# Altium PCB Slave.PcbDoc
Units mm, origin at the board's own origin, x right, y up, seen from the top; angles counter-clockwise.
Board outline 400 x 89 mm, 2 copper layers (Top Copper, Bottom Copper), stack 1.57 mm thick; 25 components, 17 nets, 98 pads, 15 vias.
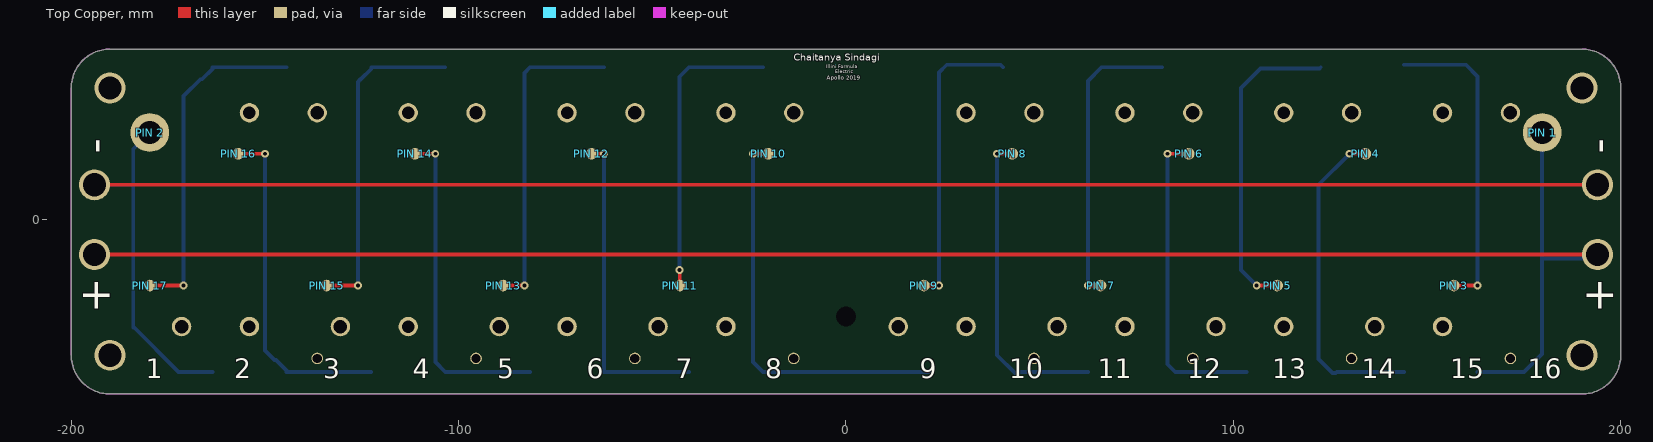
[diagram p0: Top Copper view]
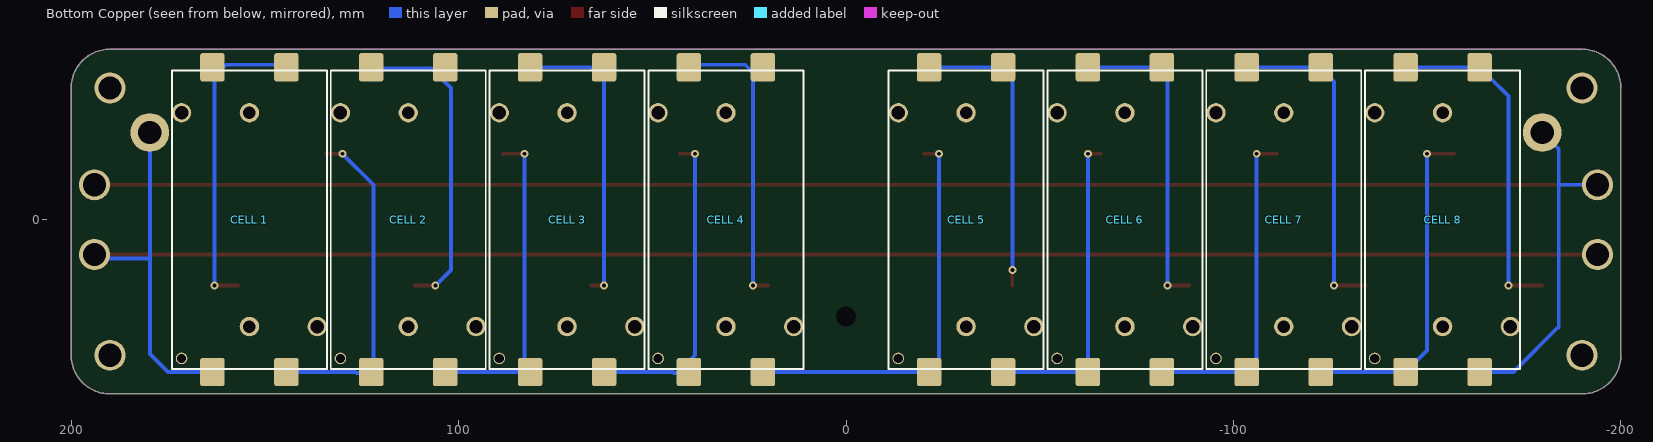
[diagram p1: Bottom Copper view, seen from below]

## Layer stack, top to bottom
Top Mask: solder mask 0.01, Solder Resist, Dk 3.8
Top Copper: signal copper 0.035
Core: core 1.5, FR-4, Dk 4.5
Bottom Copper: signal copper 0.035
Bottom Mask: solder mask 0.1, Solder Resist, Dk 3.8

## Board outline
-200,-35 -200,34 cw(c-190,34) -190,44 190,44 cw(c190,34) 200,34 200,-35 cw(c190,-35) 190,-45 -190,-45 cw(c-190,-35)

## Design rules (kind name [scope] priority, off if disabled: settings)
Clearance "Board Outline" [OnLayer('Keep-Out Layer')] p1: gap=0.2 ignorepadtopadclearanceinfootprint=TRUE
Clearance [All] p2: gap=0.102 ignorepadtopadclearanceinfootprint=TRUE
ComponentClearance [All] p1: gap=0 collisioncheckmode=3 verticalgap=0 showdistances=FALSE
FanoutControl Fanout_SOIC [IsSOIC] p3: bgadir=Out bgaviamode=Centered fanoutstyle=Auto fanoutdirection=InThenOut viagrid=0.025 // Fanout_SOIC (Default Rule)
HoleSize [All] p1: absolutevalues=TRUE maxlimit=6.3 minlimit=0.2 maxpercent=80.000 minpercent=20.000
HoleToHoleClearance [All] p1: gap=0.15 allowstackedmicrovias=TRUE
MinimumAnnularRing [All] p1: minimumring=0.076
MinimumSolderMaskSliver [All] p1: minsoldermaskwidth=0.051
PolygonConnect "Power components" [HasFootprint('FUSE1206') OR (HasFootprint('TO252') OR HasFootprint('NTC-0603'))] p1: connectstyle=Direct reliefconductorwidth=0.254 reliefentries=4 polygonreliefangle="90 Angle" airgapwidth=0.254
PolygonConnect [All] p2: thpad.connectstyle=Relief thpad.reliefconductorwidth=0.254 thpad.reliefentries=4 thpad.polygonreliefangle="90 Angle" thpad.airgapwidth=0.254 smdpad.connectstyle=Relief smdpad.reliefconductorwidth=0.254 smdpad.reliefentries=4 smdpad.polygonreliefangle="90 Angle" smdpad.airgapwidth=0.254 via.connectstyle=Direct via.reliefconductorwidth=0.254 via.reliefentries=4 via.polygonreliefangle="90 Angle" via.airgapwidth=0.254
RoutingVias [All] p1: holewidth=0.2 width=0.45 viastyle="Through Hole" minholewidth=0.2 minwidth=0.45 maxholewidth=1 maxwidth=2
SilkToSilkClearance [All] p1: silktosilkclearance=0
SilkToSolderMaskClearance [IsPad] p1: minsilkscreentomaskgap=0 clearancetoexposedcopper=TRUE
SolderMaskExpansion [All] p1: expansion=0.102
ViasUnderSMD [All] p1: allowed=TRUE
Width [All] p1: maxlimit=12.7 minlimit=0.102 preferedwidth=0.254
23 further rules are at their usual default settings.

## Classes and differential pairs
component class Carrier: "CELL 1" "CELL 2" "CELL 3" "CELL 4" "CELL 5" "CELL 6" "CELL 7" "CELL 8" "PIN 2" "PIN 3" "PIN 4" "PIN 5" "PIN 6" "PIN 7" "PIN 8" "PIN 9" "PIN 10" "PIN 11" "PIN 12" "PIN 13" "PIN 14" "PIN 15" "PIN 16"

## Components (designator, comment, footprint, x,y, rotation, side; value= is the part's Value field where it differs from the comment)
"CELL 1" "Dual 18650 Holder  - Keystone 1048P" "2x18650 Holder" 154,0 r270 bottom
"CELL 2" "Dual 18650 Holder  - Keystone 1048P" "2x18650 Holder" 113,0 r270 bottom
"CELL 3" "Dual 18650 Holder  - Keystone 1048P" "2x18650 Holder" 72,0 r270 bottom
"CELL 4" "Dual 18650 Holder  - Keystone 1048P" "2x18650 Holder" 31,0 r270 bottom
"CELL 5" "Dual 18650 Holder  - Keystone 1048P" "2x18650 Holder" -31,0 r270 bottom
"CELL 6" "Dual 18650 Holder  - Keystone 1048P" "2x18650 Holder" -72,0 r270 bottom
"CELL 7" "Dual 18650 Holder  - Keystone 1048P" "2x18650 Holder" -113,0 r270 bottom
"CELL 8" "Dual 18650 Holder  - Keystone 1048P" "2x18650 Holder" -154,0 r270 bottom
"PIN 1" "POGO Pin" "Pogo Pin"#1 179.7,22.5 r90 top
"PIN 2" "POGO Pin" "Pogo Pin"#1 -179.7,22.5 r90 top
"PIN 3" "POGO Pin" "Pogo Pin"#2 156.9,-17 r90 top
"PIN 4" "POGO Pin" "Pogo Pin"#2 134.1,17 r90 top
"PIN 5" "POGO Pin" "Pogo Pin"#2 111.3,-17 r90 top
"PIN 6" "POGO Pin" "Pogo Pin"#2 88.5,17 r90 top
"PIN 7" "POGO Pin" "Pogo Pin"#2 65.7,-17 r90 top
"PIN 8" "POGO Pin" "Pogo Pin"#2 42.9,17 r90 top
"PIN 9" "POGO Pin" "Pogo Pin"#2 20.1,-17 r90 top
"PIN 10" "POGO Pin" "Pogo Pin"#2 -20.1,17 r90 top
"PIN 11" "POGO Pin" "Pogo Pin"#2 -42.9,-17 r90 top
"PIN 12" "POGO Pin" "Pogo Pin"#2 -65.7,17 r90 top
"PIN 13" "POGO Pin" "Pogo Pin"#2 -88.5,-17 r90 top
"PIN 14" "POGO Pin" "Pogo Pin"#2 -111.3,17 r90 top
"PIN 15" "POGO Pin" "Pogo Pin"#2 -134.1,-17 r90 top
"PIN 16" "POGO Pin" "Pogo Pin"#2 -156.9,17 r90 top
"PIN 17" "POGO Pin" "Pogo Pin"#2 -179.7,-17 r90 top

## Footprints (in the part's own frame and the unit in brackets; to place one, negate y for a bottom-side part, rotate by r counter-clockwise, add the part's x,y. Pads: shape width x height; smd on the part's side, far side on the other; paste and mask are expansions set on the pad)
"2x18650 Holder" [mm]
  round 5 hole 3.45 unplated: 10(-27.6,-17.505) 11(27.6,17.505)
  round 5 hole 3.2 unplated: 10(-27.6,0) 11(27.6,0)
  round 3 hole 2.4 unplated: 11(35.82,-17.505)
  rrect20% 7.34x6.35 smd: +1(39.33,-9.555) +2(-39.33,9.555) -1(-39.33,-9.555) -2(39.33,9.555)
  silkscreen extent -38.5,-20 38.5,20
"Pogo Pin"#1 [mm] "Mill-Max 0907-8-15-20-75-14-11-0"
  round 10 hole 6: 1(0,0)
"Pogo Pin"#2 [mm] "Mill-Max 0907-8-15-20-75-14-11-0"
  round 3 smd: 1(0,0)

## Part data
"CELL 1" "CELL 2" "CELL 3" "CELL 4" "CELL 5" "CELL 6" "CELL 7" "CELL 8": library part "2x18650 Holder"

## Free pads (board coordinates)
  round 3 hole 5.105 unplated: 2(0,-25)
  round 8 hole 6: 3(-194,9) 3(-190,-35) 3(-190,34) 3(190,-35) 3(190,34) 3(194,9) 4(-194,-9) 4(194,-9)

## Via types
v1: diameter 2, hole 1, Top Copper to Bottom Copper, 15 vias

## Nets (pads, with @x,y where several pads share a name; then routed paths per layer and width w, separated by ;. In a path a pad name is that pad's centre, name@x,y a point inside that pad or via, vN(x,y) a via of type N, cw(c..) or ccw(c..) an arc to the next point about the centre after c; other vN are vias at no path point)
1: "CELL 8.+2" "CELL 8.-1" "PIN 17.1" | length 87.5
  Top Copper w1: -179.7,-17 v1(-171,-17)
  Bottom Copper w1: v1(-171,-17) -171,31.885 -166.642,36.243 -166.22,36.243 -163.555,38.908 -163.555,39.33 -144.445,39.33
2: "CELL 7.-2" "CELL 8.+1" "PIN 16.1" | length 87.7
  Top Copper w1: -156.9,17 v1(-150,17)
  Bottom Copper w1: v1(-150,17) -150,-33.775 -147.532,-36.243 -147.11,-36.243 -144.445,-38.908 -144.445,-39.33 -122.555,-39.33
3: "CELL 7.+2" "CELL 7.-1" "PIN 15.1" | length 85
  Top Copper w1: -134.1,-17 v1(-126,-17)
  Bottom Copper w1: v1(-126,-17) -126,35.574 -125.414,36.16 -125.303,36.16 -122.555,38.908 -122.555,39.33 -103.445,39.33
4: "CELL 6.-2" "CELL 7.+1" "PIN 14.1" | length 84.6
  Top Copper w1: -111.3,17 v1(-106,17)
  Bottom Copper w1: v1(-106,17) -106,-36.775 -103.445,-39.33 -81.555,-39.33
5: "CELL 6.+2" "CELL 6.-1" "PIN 13.1" | length 81.5
  Top Copper w1: -88.5,-17 v1(-83,-17)
  Bottom Copper w1: v1(-83,-17) -83,37.885 -81.555,39.33 -62.445,39.33
6: "CELL 5.-2" "CELL 6.+1" "PIN 12.1" | length 81.5
  Top Copper w1: -65.7,17 v1(-62.445,17)
  Bottom Copper w1: v1(-62.445,17) -62.445,-39.33 -40.555,-39.33
7: "CELL 5.+2" "CELL 5.-1" "PIN 11.1" | length 76.5
  Top Copper w1: v1(-43,-13) -42.9,-13.1 -42.9,-17
  Bottom Copper w1: v1(-43,-13) -43,36.885 -40.555,39.33 -21.445,39.33
8: "CELL 4.-2" "CELL 5.+1" "PIN 10.1" | length 104.2
  Top Copper w1: v1(-24,17) -20.1,17
  Bottom Copper w1: v1(-24,17) -24,-36.775 -21.445,-39.33 21.445,-39.33
9: "CELL 4.+2" "CELL 4.-1" "PIN 9.1" | length 76.6
  Top Copper w1: 20.1,-17 v1(24,-17)
  Bottom Copper w1: v1(24,-17) 24,38 26,40 39.885,40 40.555,39.33
10: "CELL 3.-2" "CELL 4.+1" "PIN 8.1" | length 81.4
  Top Copper w1: v1(39,17) 42.9,17
  Bottom Copper w1: v1(39,17) 39,-35 43.586,-39.586 44.414,-39.586 44.67,-39.33 62.445,-39.33
11: "CELL 3.+2" "CELL 3.-1" "PIN 7.1" | length 76.6
  Top Copper w1: v1(62.445,-17) 65.7,-17
  Bottom Copper w1: v1(62.445,-17) 62.445,35.775 66,39.33 81.555,39.33
12: "CELL 2.-2" "CELL 3.+1" "PIN 6.1" | length 81.1
  Top Copper w1: v1(83,17) 88.5,17
  Bottom Copper w1: v1(83,17) 83,-37.33 85,-39.33 103.445,-39.33
13: "CELL 2.+2" "CELL 2.-1" "PIN 5.1" | length 80.7
  Top Copper w1: v1(106,-17) 111.3,-17
  Bottom Copper w1: v1(106,-17) 102,-13 102,34 107,39 122.225,39 122.555,39.33
14: "CELL 1.-2" "CELL 2.+1" "PIN 4.1" | length 84
  Top Copper w1: v1(130,17) 134.1,17
  Bottom Copper w1: v1(130,17) 122,9 122,-36 125.586,-39.586 126.414,-39.586 126.67,-39.33 144,-39.33
15: "CELL 1.+2" "CELL 1.-1" "PIN 3.1" | length 80.3
  Top Copper w1: 156.9,-17 v1(163,-17)
  Bottom Copper w1: 144,40 160,40 163,37 v1(163,-17)
GND: "CELL 8.-2" "PIN 2.1" pad.3@194,9 pad.3@-194,9 | length 475.2
  Top Copper w1: pad.3@-194,9 pad.3@194,9
  Bottom Copper w1: pad.3@-194,9 -184,9 ; -184,-27.8 -184,-27.6 ; -184,18 -184,9 ; -184,18.2 -179.7,22.5 ; -163.555,-39.33 -172.27,-39.33 -184,-27.6 ; -184,-27.6 -184,9
TOP: "CELL 1.+1" "PIN 1.1" pad.4 | length 478.5
  Top Copper w1: pad.4@-194,-9 pad.4@194,-9
  Bottom Copper w1: 163,-39.33 175,-39.33 179.7,-34.63 179.7,-10 ; 179.7,22.5 179.7,-10 ; pad.4@194,-9 193,-10 179.7,-10
pads on no net: "CELL 1.10" "CELL 1.11" "CELL 2.10" "CELL 2.11" "CELL 3.10" "CELL 3.11" "CELL 4.10" "CELL 4.11" "CELL 5.10" "CELL 5.11" "CELL 6.10" "CELL 6.11" "CELL 7.10" "CELL 7.11" "CELL 8.10" "CELL 8.11"

## Keep-outs
Keep-Out Layer:
  lines w0.152: -200,-35 -200,0 -200,34 ; -190,-45 190,-45 ; -190,44 190,44 ; 200,-35 200,34
  lines w0.2: -200,-35 ccw(c-190,-35) -190,-45 ; -200,34 cw(c-190,34) -190,44 ; 190,-45 ccw(c190,-35) 200,-35 ; 190,44 cw(c190,34) 200,34

## Silkscreen, mask and mechanical layers (free items; w line width, h text height)
Top Overlay:
  text "Chaitanya Sindagi" at -13.495,41 h1.8
  text "Illini Formula" at -5.1,39.05 h0.81
  text "Electric" at -2.8,37.85 h0.81
  text "Apollo 2019" at -5,36.15 h1
  text "-" at -190,17 h8 r90
  text "-" at 198,17 h8 r90
  text "+" at -198,-23 h8
  text "+" at 190,-23 h8
  text "1" at -180.7,-41 h5
  text "2" at -157.9,-41 h5
  text "3" at -135,-41 h5
  text "4" at -111.9,-41 h5
  text "5" at -90,-41 h5
  text "6" at -66.9,-41 h5
  text "7" at -44,-41 h5
  text "8" at -20.9,-41 h5
  text "9" at 19,-41 h5
  text "10" at 42.1,-41 h5
  text "11" at 65,-41 h5
  text "12" at 88.1,-41 h5
  text "13" at 110,-41 h5
  text "14" at 133.1,-41 h5
  text "15" at 156,-41 h5
  text "16" at 176,-41 h5